# Altium PCB PCB1.PcbDoc
Units mil, origin at the board's own origin, x right, y up, seen from the top; angles counter-clockwise.
Board outline 3120.02 x 2940.03 mil, 2 copper layers (Top Layer, Bottom Layer); 17 components, 15 nets, 157 pads, 2 vias.
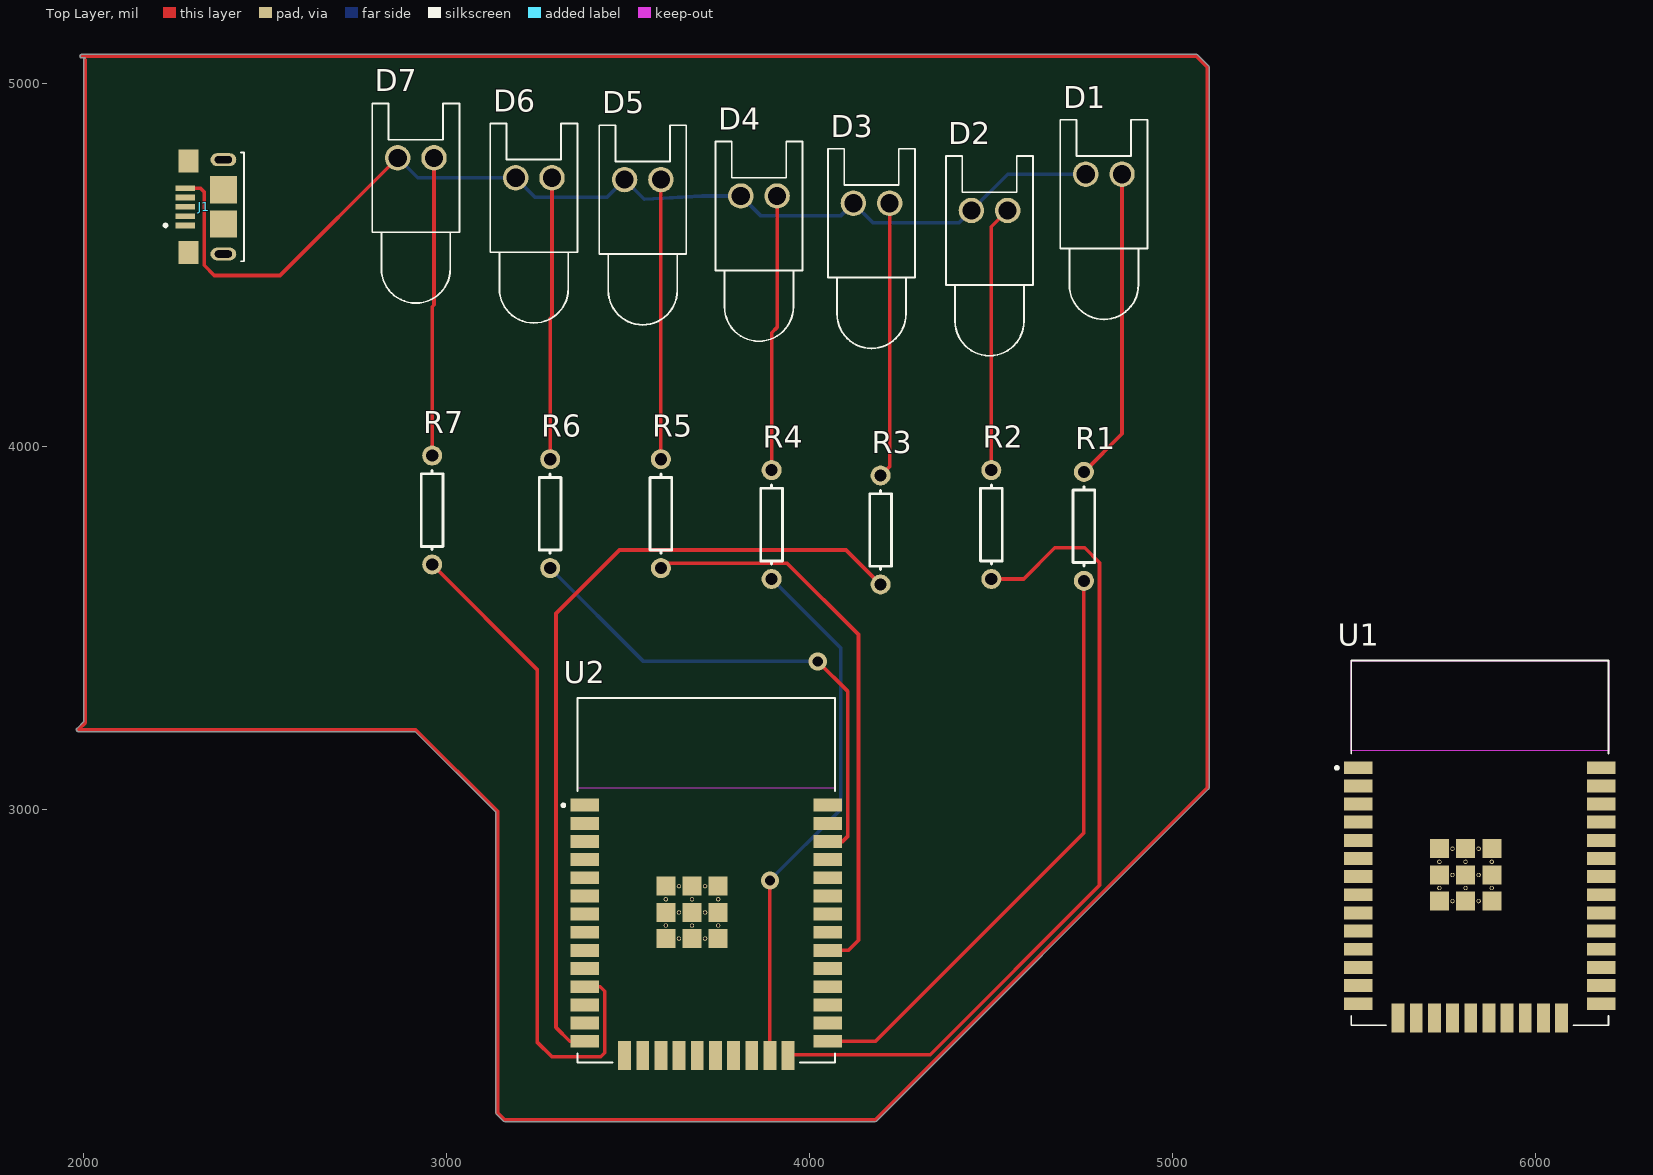
[diagram p0: Top Layer view]
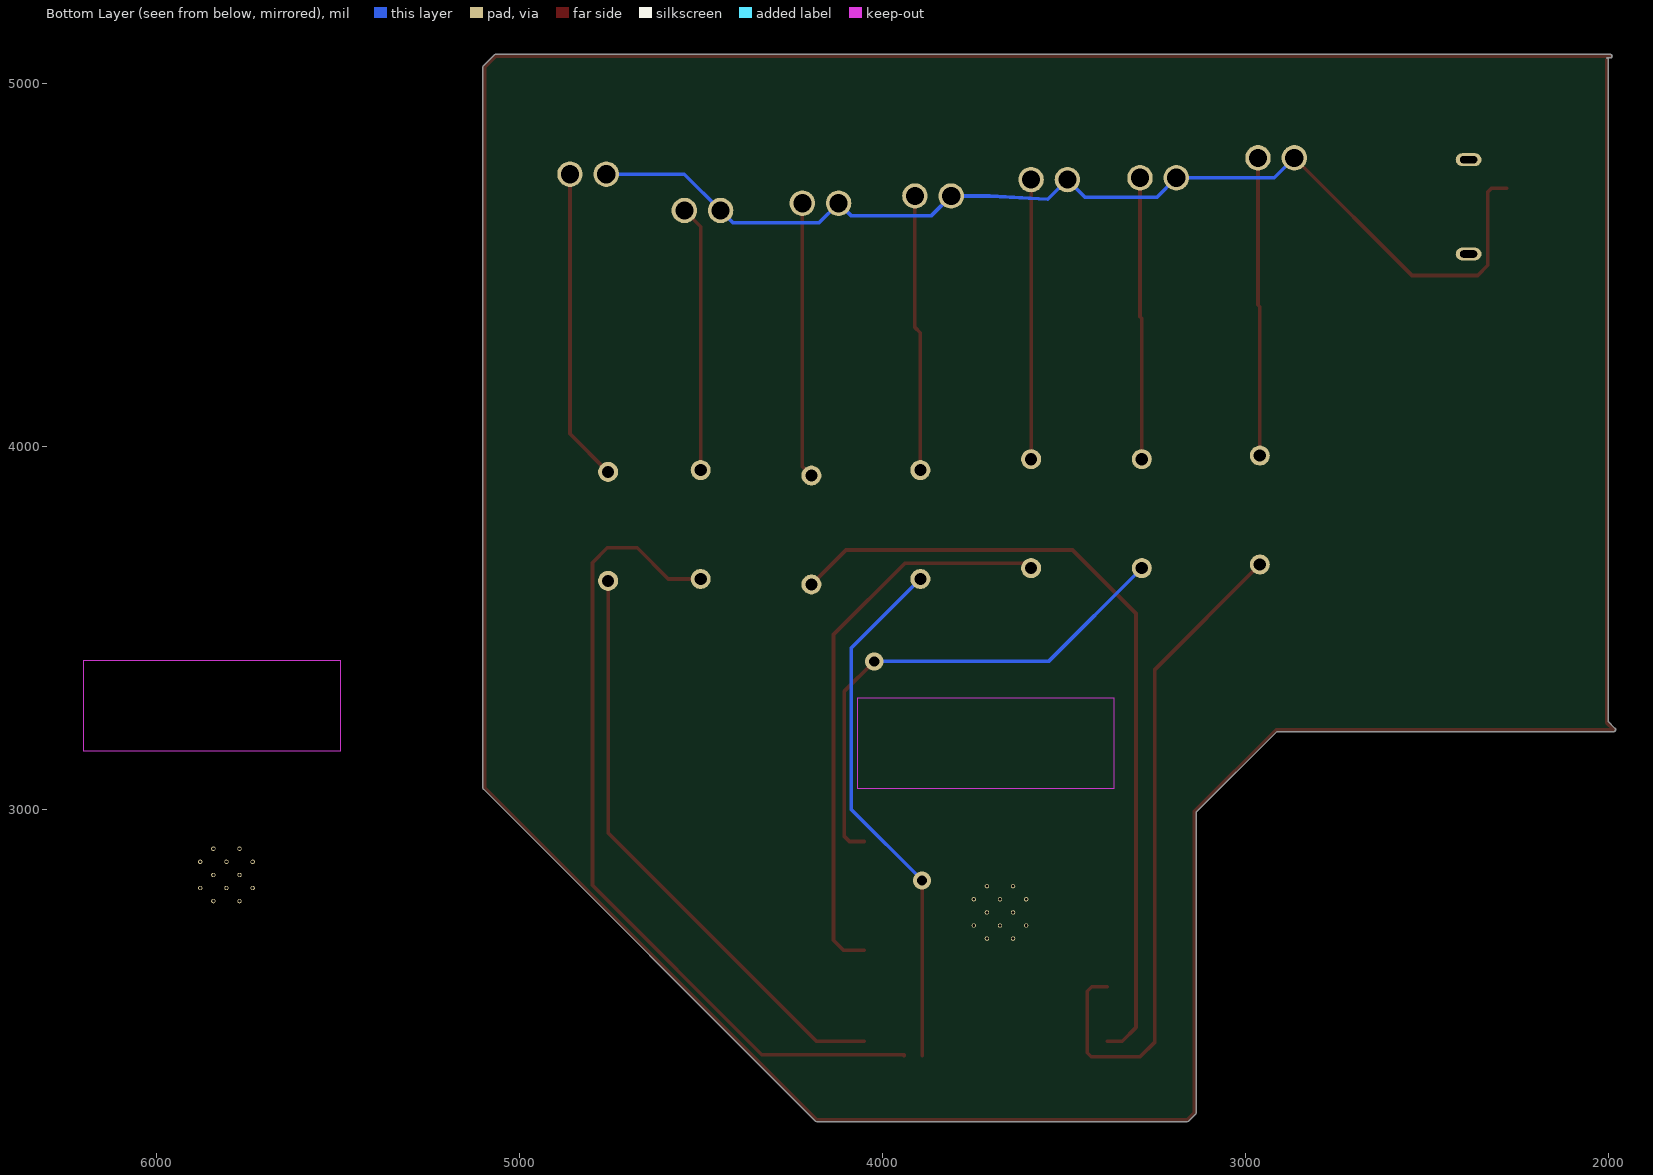
[diagram p1: Bottom Layer view, seen from below]

## Layer stack, top to bottom
Top Solder: solder mask 0.4, Solder Resist, Dk 3.5
Top Layer: signal copper 1.4
Dielectric 1: dielectric 12.6, FR-4, Dk 4.8
Bottom Layer: signal copper 1.4
Bottom Solder: solder mask 0.4, Solder Resist, Dk 3.5

## Board outline
1985,3214.99 cw(c1985,3220) 1981.47,3223.56 1981.45,3223.55 1999.98,3242.08 1999.98,5065 cw(c2005,5065) 2004.45,5069.98 1995,5069.98 cw(c1995,5075) 1995,5080.02 5065,5080.02 5068.55,5078.55 5098.55,5048.55 5100.02,5045 5100.02,3060 5098.55,3056.45 4183.55,2141.45 4180,2139.99 3160,2139.99 3156.45,2141.45 3136.45,2161.45 3134.99,2165 3134.99,2992.92 2912.92,3214.99

## Design rules (kind name [scope] priority, off if disabled: settings)
Clearance [All] p1: gap=10 ignorepadtopadclearanceinfootprint=FALSE except(0: Arc-Hole Track-Hole SMDPad-Hole THPad-Hole Via-Hole Fill-Hole Poly-Hole Region-Hole Text-Hole)
PolygonConnect [All] p1: connectstyle=Relief reliefconductorwidth=10 reliefentries=4 polygonreliefangle="90 Angle" airgapwidth=10
RoomDefinition Sheet1 [InComponentClass('Sheet1')] p1: confinementstyle=ConfineIn formatcopy=TRUE lockcomponents=FALSE outline 1241.46,738.98 6666.46,738.98 6666.46,5098.98 1241.46,5098.98
RoutingVias [All] p1: holewidth=28 width=50 viastyle="Through Hole" minholewidth=28 minwidth=50 maxholewidth=28 maxwidth=50
SolderMaskExpansion [All] p1: expansion=4 istentingtop=FALSE
Width [All] p1: maxlimit=10 minlimit=10 preferedwidth=10
30 further rules are at their usual default settings.

## Components (designator, comment, footprint, x,y, rotation, side; value= is the part's Value field where it differs from the comment)
D1 "LED0" LED-0 4810,4750 r0 top
D2 "LED0" LED-0 4495,4650 r0 top
D3 "LED0" LED-0 4170,4670 r0 top
D4 "LED0" LED-0 3860,4690 r0 top
D5 "LED0" LED-0 3540,4735 r0 top
D6 "LED0" LED-0 3240,4740 r0 top
D7 "LED0" LED-0 2915,4795 r0 top
J1 "10118193-0001LF" AMPHENOL_10118193-0001LF 2385,4660 r90 top
R1 "Res1" AXIAL-0.3 4755,3780 r90 top value=220R
R2 "Res1" AXIAL-0.3 4500,3785 r90 top value=220R
R3 "Res1" AXIAL-0.3 4195,3770 r90 top value=220R
R4 "Res1" AXIAL-0.3 3895,3785 r90 top value=220R
R5 "Res1" AXIAL-0.3 3590,3815 r90 top value=220R
R6 "Res1" AXIAL-0.3 3285,3815 r90 top value=220R
R7 "Res1" AXIAL-0.3 2960,3825 r90 top value=220R
U1 "ESP32-WROOM-32D" MODULE_ESP32-WROOM-32D 5845.49,2908.19 r0 top
U2 "ESP32-WROOM-32D" MODULE_ESP32-WROOM-32D 3715,2805 r0 top

## Footprints (in the part's own frame and the unit in brackets; to place one, negate y for a bottom-side part, rotate by r counter-clockwise, add the part's x,y. Pads: shape width x height; smd on the part's side, far side on the other; paste and mask are expansions set on the pad)
AMPHENOL_10118193-0001LF [mm]
  rect 0.4x1.35 smd: 1(-1.3,2.675) 2(-0.65,2.675) 3(0,2.675) 4(0.65,2.675) 5(1.3,2.675)
  rect 1.6x1.4 smd: S1(-3.2,2.45) S2(3.2,2.45)
  rect 1.9x1.9 smd: S3(1.2,0) S4(-1.2,0)
  oval 0.9x1.8 hole 0.5 slot 1.2 at 90 deg: S5(-3.3,0) S6(3.3,0)
  silkscreen extent -3.8,-1.45 3.8,4.15, body extent 94.07,-5.91 101.93,-0.25, height 3.18
AXIAL-0.3 [mm] "Axial Device, Thru-Hole; 2 Leads; 0.3 in Pin Spacing"
  round 1.4 hole 0.85: 1(-3.81,0) 2(3.81,0)
  silkscreen extent -2.77,-0.76 2.77,0.76
LED-0 [mil] "LED; 2 Leads"
  round 70 hole 50: 1(50,0) 2(-50,0)
  silkscreen extent -120,-400 120,150
MODULE_ESP32-WROOM-32D [mm]
  rect 2x0.9 smd: 1(-8.5,5.26) 2(-8.5,3.99) 3(-8.5,2.72) 4(-8.5,1.45) 5(-8.5,0.18) 6(-8.5,-1.09) 7(-8.5,-2.36) 8(-8.5,-3.63) 9(-8.5,-4.9) 10(-8.5,-6.17) 11(-8.5,-7.44) 12(-8.5,-8.71) 13(-8.5,-9.98) 14(-8.5,-11.25) 25(8.5,-11.25) 26(8.5,-9.98) 27(8.5,-8.71) 28(8.5,-7.44) 29(8.5,-6.17) 30(8.5,-4.9) 31(8.5,-3.63) 32(8.5,-2.36) 33(8.5,-1.09) 34(8.5,0.18) 35(8.5,1.45) 36(8.5,2.72) 37(8.5,3.99) 38(8.5,5.26)
  rect 0.9x2 smd: 15(-5.715,-12.25) 16(-4.445,-12.25) 17(-3.175,-12.25) 18(-1.905,-12.25) 19(-0.635,-12.25) 20(0.635,-12.25) 21(1.905,-12.25) 22(3.175,-12.25) 23(4.445,-12.25) 24(5.715,-12.25)
  rect 1.33x1.33 smd: 39_1(-2.835,-0.405) 39_2(-1,-0.405) 39_3(0.835,-0.405) 39_4(-2.835,-2.24) 39_5(-1,-2.24) 39_6(0.835,-2.24) 39_7(-2.835,-4.075) 39_8(-1,-4.075) 39_9(0.835,-4.075)
  round 0.3 hole 0.2: 39_10(-1.917,-0.405) 39_11(-0.083,-0.405) 39_12(-2.835,-1.323) 39_13(-1,-1.323) 39_14(0.835,-1.323) 39_15(-1.917,-2.24) 39_16(-0.083,-2.24) 39_17(-2.835,-3.157) 39_18(-1,-3.157) 39_19(0.835,-3.157) 39_20(-1.917,-4.075) 39_21(-0.083,-4.075)
  Keep-Out Layer region: 9,6.45 -9,6.45 -9,12.75 9,12.75
  silkscreen extent -10.1,-12.75 9,12.75, body extent -9,-12.75 9,12.75, height 3.25

## Part data
D1 D2 D3 D4 D5 D6 D7: "Typical INFRARED GaAs LED", LatestRevisionDate=08-Jul-2005, LatestRevisionNote="Mech Layer 1 removed.", PackageDescription="LED; 2 Leads", PackageReference=LED-0, Published=8-Jun-2000, Publisher="Altium Limited"
J1: "Micro USB 2.0, Input Output Connectors, B TYPE RECEPTACLE", Package=None, Availability="In Stock", Check_prices=https://www.snapeda.com/parts/10118193-0001LF/Amphenol+FCI/view-part/?ref=eda, MF="Amphenol ICC", MP=10118193-0001LF, Price=None, Purchase-URL=https://pricing.snapeda.com/search/part/10118193-0001LF/?ref=eda, SnapEDA_Link=https://www.snapeda.com/parts/10118193-0001LF/Amphenol+FCI/view-part/?ref=snap
R1 R2 R3 R4 R5 R6 R7: "Resistor", LatestRevisionDate=17-Jul-2002, LatestRevisionNote="Re-released for DXP Platform.", PackageDescription="Axial Device, Thru-Hole; 2 Leads; 0.3 in Pin Spacing", PackageReference=AXIAL-0.3, Published=8-Jun-2000, Publisher="Altium Limited"
U1 U2: "Bluetooth, WiFi 802.11b/g/n, Bluetooth v4.2 +EDR, Class 1, 2 and 3 Transceiver Module 2.4GHz ~ 2.5GHz Integrated", Package="Module Espressif Systems", Availability="In Stock", Check_prices=https://www.snapeda.com/parts/ESP32-WROOM-32D/Espressif+Systems/view-part/?ref=eda, MF="Espressif Systems", MP=ESP32-WROOM-32D, Price=None, Purchase-URL=https://pricing.snapeda.com/search/part/ESP32-WROOM-32D/?ref=eda, SnapEDA_Link=https://www.snapeda.com/parts/ESP32-WROOM-32D/Espressif+Systems/view-part/?ref=snap

## Via types
v1: diameter 50, hole 28, Top Layer to Bottom Layer, 2 vias

## Nets (pads, with @x,y where several pads share a name; then routed paths per layer and width w, separated by ;. In a path a pad name is that pad's centre, name@x,y a point inside that pad or via, vN(x,y) a via of type N, cw(c..) or ccw(c..) an arc to the next point about the centre after c; other vN are vias at no path point)
GND: D1.2 D2.2 D3.2 D4.2 D5.2 D6.2 D7.2 J1.5 | length 3034.8
  Top Layer w10: J1.5 2322,4711.18 2332,4701.18 2332,4499 2360,4471 2541,4471 D7.2
  Bottom Layer w10: D7.2 2920,4740 D6.2 3244,4686 3441,4686 D5.2 3544,4681 3704,4690 D4.2 3864,4636 4086,4636 D3.2 4174,4616 4411,4616 D2.2 4545,4750 D1.2
NetD1_1: D1.1 R1.2 | length 863.5
  Top Layer w10: R1.2 4860,4035 D1.1
NetD2_1: D2.1 R2.2 | length 733.6
  Top Layer w10: R2.2 4500,4605 D2.1
NetD3_1: D3.1 R3.2 | length 760.4
  Top Layer w10: R3.2 4220,3945 D3.1
NetD4_1: D4.1 R4.2 | length 761.2
  Top Layer w10: R4.2 3895,4313 3910,4328 D4.1
NetD5_1: D5.1 R5.2 | length 770
  Top Layer w10: R5.2 D5.1
NetD6_1: D6.1 R6.2 | length 777.1
  Top Layer w10: R6.2 3285,4353 3290,4358 D6.1
NetD7_1: D7.1 R7.2 | length 822.1
  Top Layer w10: R7.2 2960,4385 2965,4390 D7.1
NetR1_1: R1.1 U2.25 | length 1637
  Top Layer w10: U2.25 4181,2362.09 4755,2936.09 R1.1
NetR2_1: R2.1 U2.24 | length 2292.7
  Top Layer w10: U2.24 3940,2325 4331.71,2325 4798,2791.29 4798,3680 4757,3721 4675,3721 4589,3635 R2.1
NetR3_1: R3.1 U2.14 | length 2240.9
  Top Layer w10: U2.14 3338.91,2362.09 3301,2400 3301,3540 3476,3715 4100,3715 R3.1
NetR4_1: R4.1 U2.23 | length 1471.8
  Top Layer w10: U2.23 v1(3890,2805)
  Bottom Layer w10: v1(3890,2805) 4085,3000 4085,3445 R4.1
NetR5_1: R5.1 U2.30 | length 1568.5
  Top Layer w10: R5.1 3603,3678 3938,3678 4134,3482 4134,2640 4106.09,2612.09 U2.30
NetR6_1: R6.1 U2.36 | length 1420.3
  Top Layer w10: v1(4022,3408) 4105,3325 4105,2927.09 4090,2912.09 U2.36
  Bottom Layer w10: R6.1 3542,3408 v1(4022,3408)
NetR7_1: R7.1 U2.11 | length 1871.9
  Top Layer w10: R7.1 3249,3386 3249,2360 3290,2319 3424,2319 3435,2330 3435,2500 3422.91,2512.09 U2.11
pads on no net: J1.1 J1.2 J1.3 J1.4 J1.S1 J1.S2 J1.S3 J1.S4 J1.S5 J1.S6 U1.1 U1.2 U1.3 U1.4 U1.5 U1.6 U1.7 U1.8 U1.9 U1.10 U1.11 U1.12 U1.13 U1.14 U1.15 U1.16 U1.17 U1.18 U1.19 U1.20 U1.21 U1.22 U1.23 U1.24 U1.25 U1.26 U1.27 U1.28 U1.29 U1.30 U1.31 U1.32 U1.33 U1.34 U1.35 U1.36 U1.37 U1.38 U1.39_1 U1.39_2 U1.39_3 U1.39_4 U1.39_5 U1.39_6 U1.39_7 U1.39_8 U1.39_9 U1.39_10 U1.39_11 U1.39_12 U1.39_13 U1.39_14 U1.39_15 U1.39_16 U1.39_17 U1.39_18 U1.39_19 U1.39_20 U1.39_21 U2.1 U2.2 U2.3 U2.4 U2.5 U2.6 U2.7 U2.8 U2.9 U2.10 U2.12 U2.13 U2.15 U2.16 U2.17 U2.18 U2.19 U2.20 U2.21 U2.22 U2.26 U2.27 U2.28 U2.29 U2.31 U2.32 U2.33 U2.34 U2.35 U2.37 U2.38 U2.39_1 U2.39_2 U2.39_3 U2.39_4 U2.39_5 U2.39_6 U2.39_7 U2.39_8 U2.39_9 U2.39_10 U2.39_11 U2.39_12 U2.39_13 U2.39_14 U2.39_15 U2.39_16 U2.39_17 U2.39_18 U2.39_19 U2.39_20 U2.39_21
copper on no net: | length 11371.2
  Top Layer w10: 1995,5075 5065,5075 5095,5045 5095,3060 4180,2145 3160,2145 3140,2165 3140,2995 2915,3220 1985,3220 2005,3240 2005,5065

## Text inside footprints (layer, text, board x,y; h text height)
J1: Mechanical 13 "PCB END" at 2432.24,4850.94 h16 r90
U1: Mechanical 13 "ANTENNA" at 5609.27,3262.52 h70
U2: Mechanical 13 "ANTENNA" at 3478.78,3159.33 h70